# EAGLE board tentacle_tip (EAGLE 7.1.0)
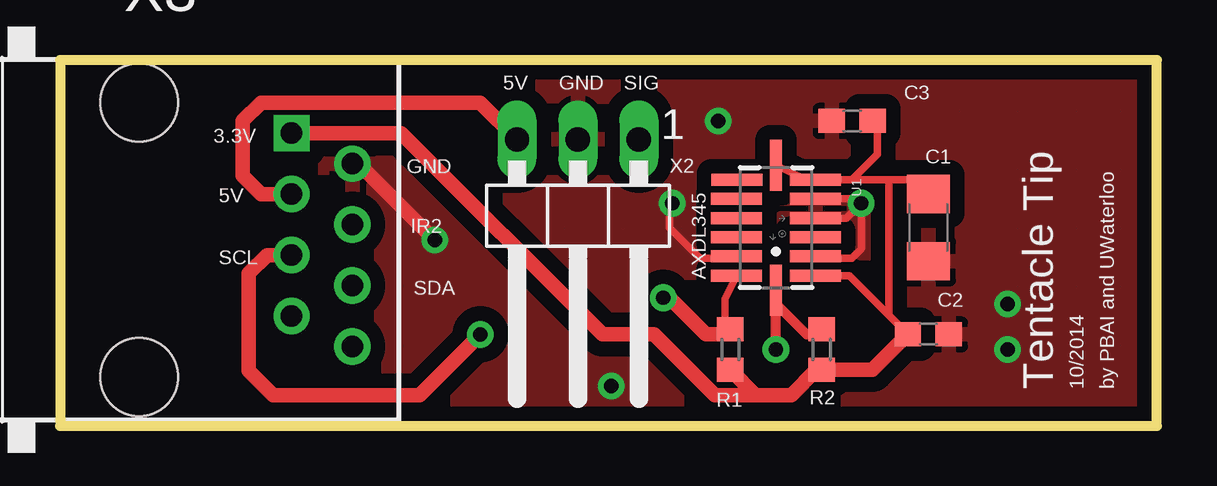
[diagram p0: board, top side]
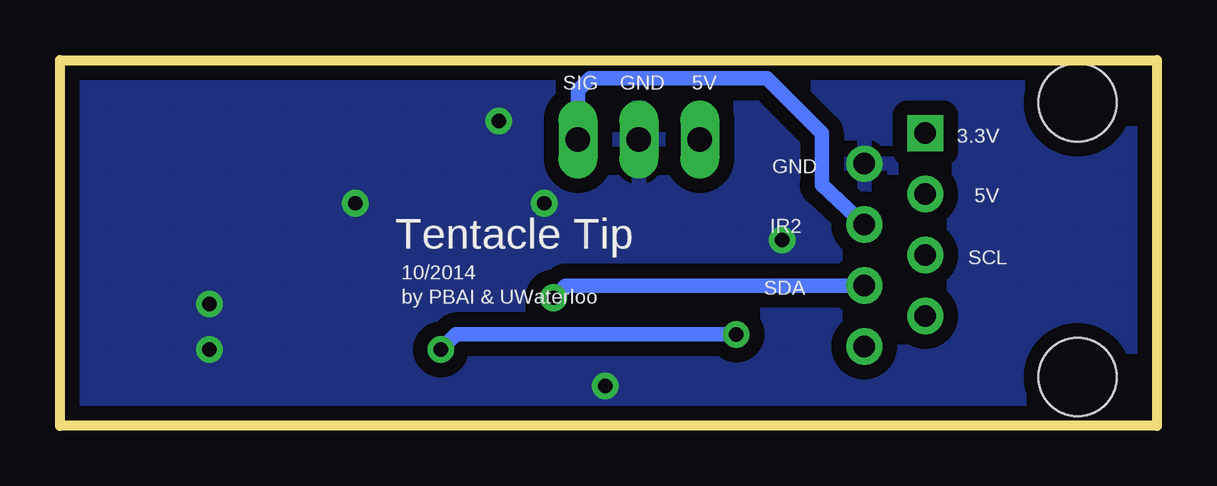
[diagram p1: board, bottom side, seen from below]

Size 45.72 x 15.24 mm. Coordinates in mm from the lower left corner, seen from the top.
Outline: 0,0 45.72,0 45.72,15.24 0,15.24 0,0
Copper layers (1*16): Top 0.035mm / dielectric 1.5mm / Bottom 0.035mm
Design rules "SparkFun": minimum track width 8mil, minimum drill 20mil, track to track 8mil, track to pad 8mil, pad to pad 8mil, via to via 8mil, smd to smd 8mil, copper to edge 10mil, drill to drill 8mil, minimum pad ring 12mil, minimum via ring 10mil, stop-mask expansion 4mil, vias tented up to drill 25mil, thermal gap 10mil

## Footprints (pad centres in the part's own frame; a part is rotated, then mirrored left to right if it is on the bottom)
C1206 = smd 1.6 x 1.8: 1 -1.4,0; 2 1.4,0
C0603 = smd 1.1 x 1: 1 -0.85,0; 2 0.85,0
R0603 = smd 1 x 1.1: 1 -0.85,0; 2 0.85,0
LGA14_LONG = smd 0.5 x 2.124: 1 2,1.638; 2 1.2,1.638; 3 0.4,1.638; 4 -0.4,1.638; 5 -1.2,1.638; 6 -2,1.638; 8 -2,-1.63; 9 -1.2,-1.638; 10 -0.4,-1.638; 11 0.4,-1.638; 12 1.2,-1.638; 13 2,-1.638 | smd 2.124 x 0.5: 7 -2.6,0; 14 2.6,0
1X03/90 = drill 1.016 long: 1 -2.54,-3.81; 2 0,-3.81; 3 2.54,-3.81
RJ45-NO-SHIELD = drill 0.9 pad 1.4 square: 1 -4.445,6.35 | drill 0.9 pad 1.4: 2 -3.175,8.89; 3 -1.905,6.35; 4 -0.635,8.89; 5 0.635,6.35; 6 1.905,8.89; 7 3.175,6.35; 8 4.445,8.89 | hole 3.251: -5.715,0; 5.715,0

## Placement (x,y rotation side)
C1  10uF  [C1206]  36.2,8.26 270 top
C2  0.1uF  [C0603]  36.2,3.81 0 top
C3  0.1uF  [C0603]  33.02,12.7 180 top
R1  2.2k  [R0603]  27.94,3.17 270 top
R2  2.2k  [R0603]  31.75,3.17 270 top
U1  ADXL345  [LGA14_LONG]  29.84,8.26 270 top
X2  [1X03/90]  21.59,8.12 180 top
X3  RJ45-8X  [RJ45-NO-SHIELD]  3.3,7.75 270 top

## Library data of the parts
C1-C3 R1 R2 = rcl
U1 X2 = CBLA_Test_bed_Library
X3 = CBLA_Test_bed_Library; MPN: RJ45-8X; OC_FARNELL: unknown; OC_NEWARK: 16R6101

## Nets
+3.3V: C1.1 C2.1 C3.1 R1.2 R2.2 U1.1 U1.6 U1.7 X3.1
+5V: X2.3 X3.3
GND: C1.2 C2.2 C3.2 U1.2 U1.4 U1.5 U1.12 X2.2 X3.2
IR2: X2.1 X3.4
SCL: R2.1 U1.14 X3.5
SDA: R1.1 U1.13 X3.6

## Tracks (layer width: path | path; a pad name or v marks a point on that pad's centre or on a via)
+3.3V
  Top 0.305: 33.02,10.26 34.08,11.31 34.08,12.49 C3.1 | U1.1 32.9,6.25 34.54,4.61 | U1.7 30.88,10.36 U1.6 33.02,10.26 | 33.02,10.26 34.54,10.26 | 34.54,10.26 35.47,10.26 35.56,10.16 C1.1 | 34.54,10.26 34.54,4.61 | 34.54,4.61 C2.1
  Top 0.61: C2.1 33.86,2.33 R2.2 31.54,2.33 30.48,1.27 29,1.27 | R1.2 29,1.27 | 29,1.27 27.3,1.27 24.77,3.81 22.61,3.81 14.22,12.19 X3.1
+5V
  Top 0.61: X2.3 17.52,13.46 8.38,13.46 7.62,12.7 7.62,10.41 8.38,9.65 X3.3
GND  (via drill 0.6)
  Top 0.305: 28.65,7.11 U1.12 28.14,6.99 26.67,6.99 25.4,8.26 25.4,9.14 v25.53,9.27 | U1.5 33.22,9.46 v33.4,9.27 | U1.4 32.78,8.65 v33.4,9.27 | v33.4,9.27 33.4,7.37 33.02,6.99 31.55,6.99 U1.2
  Top 0.61: X3.2 12.45,10.92 15.49,7.87
  Bottom 0.61: 25.4,9.14 v25.53,9.27
  other vias: 39.5,3.17 27.43,12.7 39.5,5.08 15.62,7.75 22.99,1.65
  pour Top (isolate 0.61, hatched): 0,15.24 0,0 45.72,0 45.72,15.24
  pour Bottom (isolate 0.61, hatched): 0,15.24 0,0 45.72,0 45.72,15.24
IR2
  Bottom 0.61: X2.1 24.13,13.97 23.62,14.48 16.26,14.48 13.97,12.19 13.97,10.03 X3.4
SCL  (via drill 0.6)
  Top 0.406: R2.1 31.54,3.81 31.11,3.81 29.84,5.08 U1.14 v29.84,3.17
  Top 0.61: v17.53,3.81 14.99,1.27 8.89,1.27 7.87,2.29 7.87,6.35 8.64,7.11 X3.5
  Bottom 0.61: v17.53,3.81 29.21,3.81 v29.84,3.17
SDA  (via drill 0.6)
  Top 0.305: R1.1 27.73,4.03 27.73,5.27 U1.13
  Top 0.61: v25.15,5.33 25.4,5.33 26.92,3.81 27.73,3.81 R1.1
  Bottom 0.61: 25.02,5.46 v25.15,5.33 24.64,5.84 X3.6

## Text on the board
tPlace: 5V | GND | SIG | 3.3V | GND | 5V | IR2 | SCL | AXDL345 | SDA | Tentacle Tip | 10/2014 | by PBAI and UWaterloo
bPlace: 5V | GND | SIG | 3.3V | GND | 5V | IR2 | SCL | Tentacle Tip | 10/2014 | SDA | by PBAI & UWaterloo